# Altium PCB Hyundai_Giraffe.pcbdoc
Units mm, origin at the board's own origin, x right, y up, seen from the top; angles counter-clockwise.
Board outline 98.63 x 70.65 mm, 2 copper layers (Top Layer, Bottom Layer); 8 components, 14 nets, 75 pads, 25 vias.
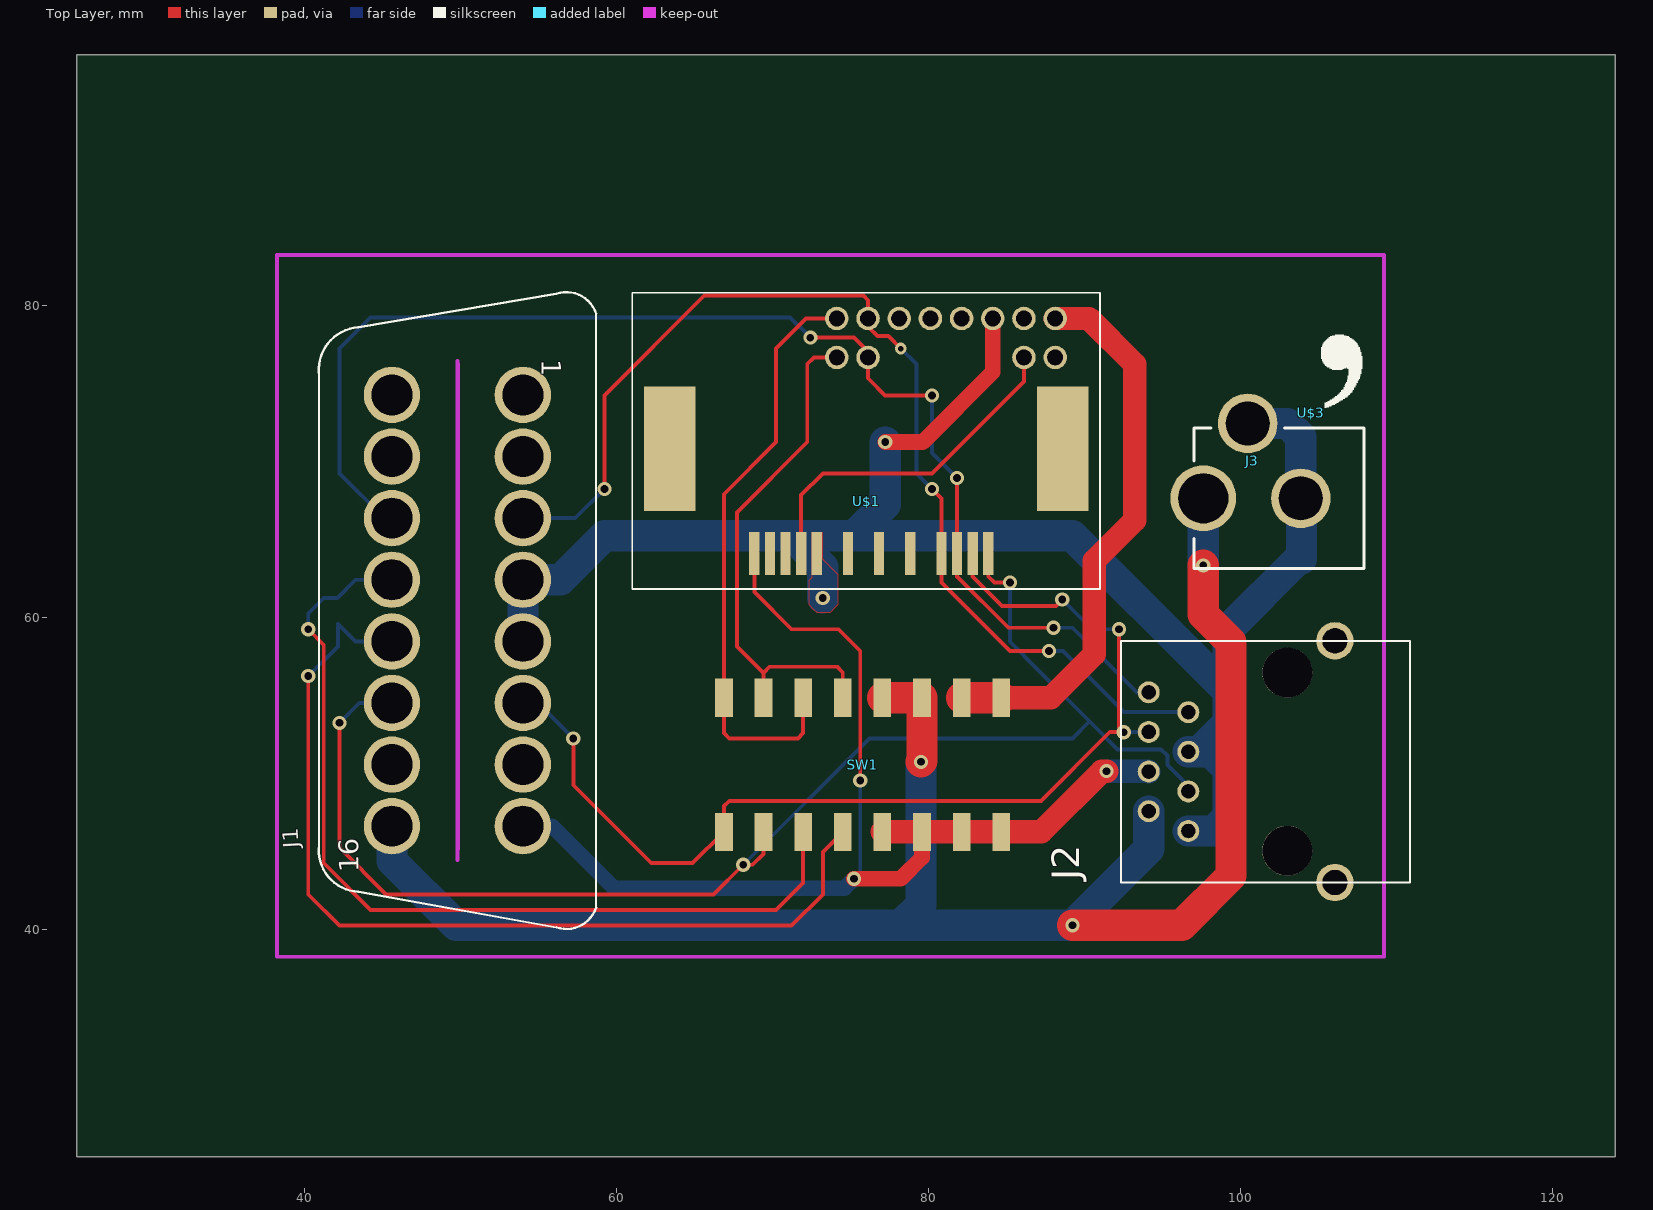
[diagram p0: Top Layer view]
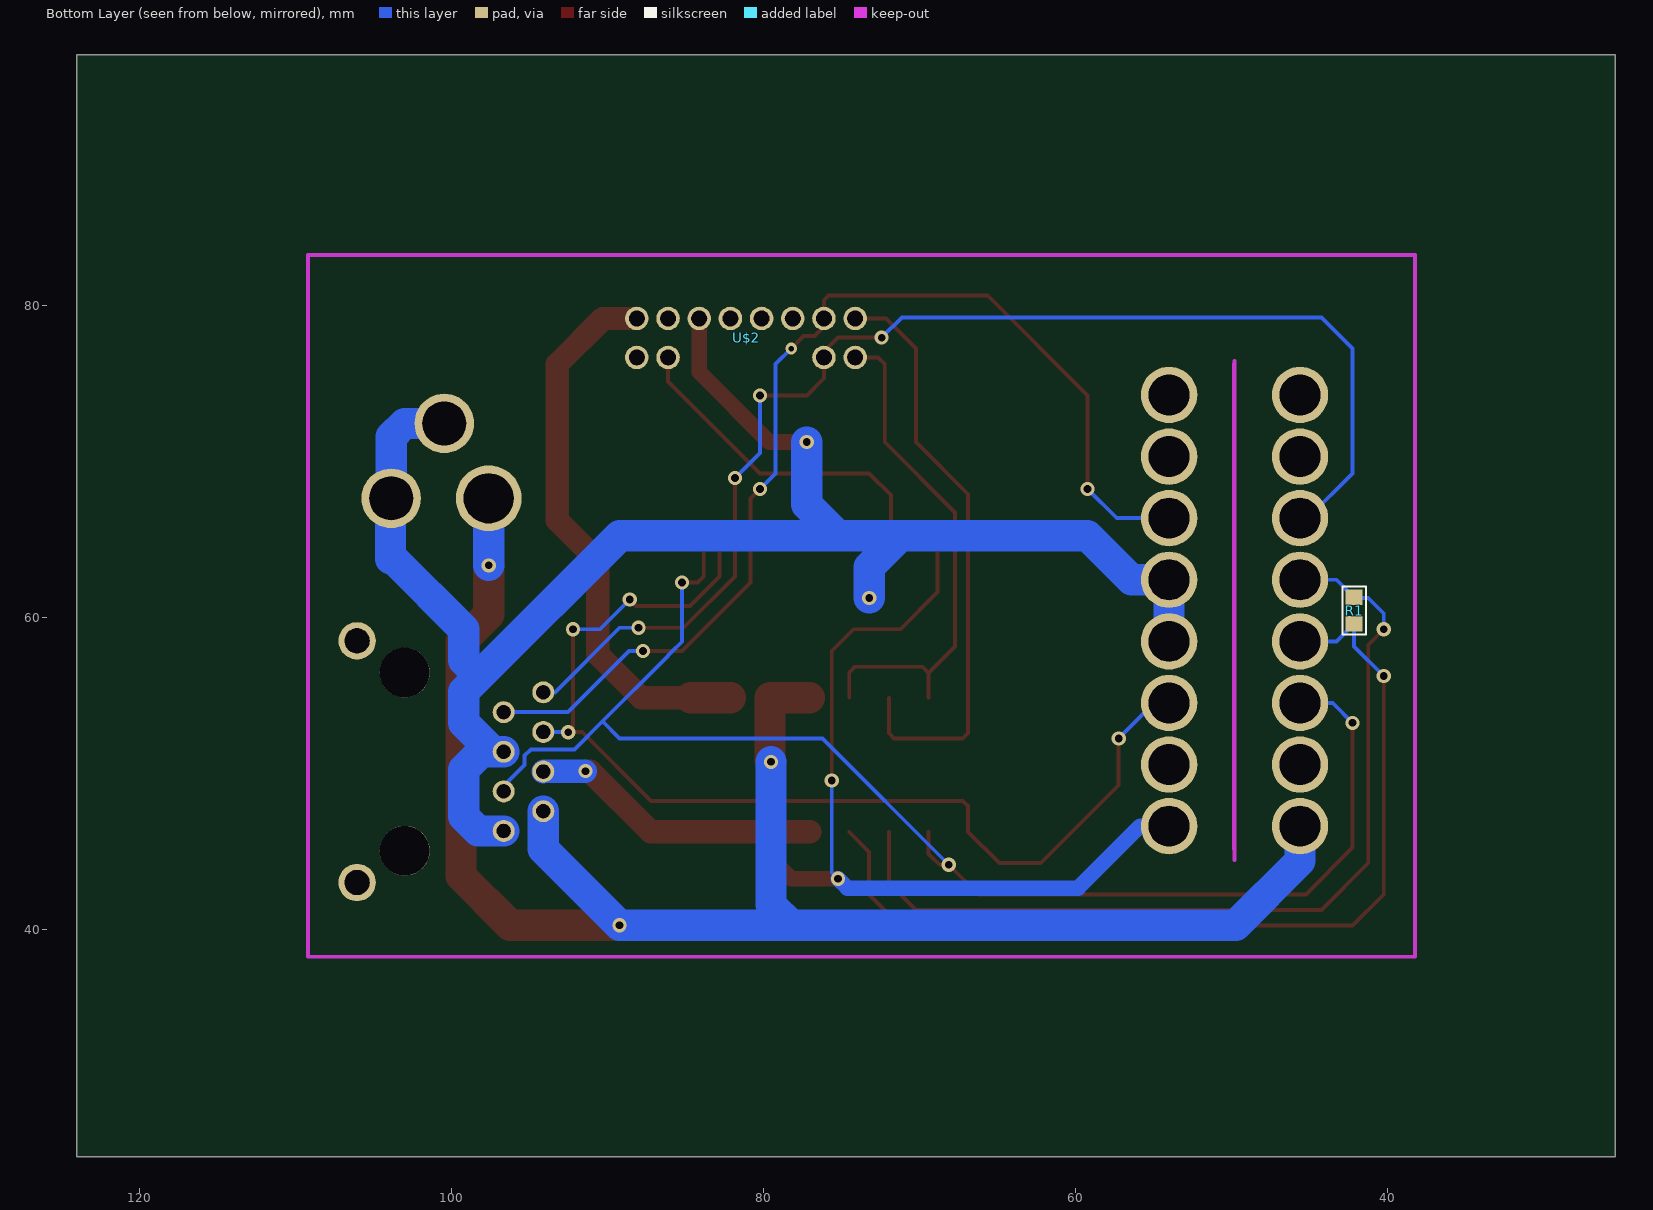
[diagram p1: Bottom Layer view, seen from below]

## Layer stack, top to bottom
Top Layer: signal copper (thickness not stored)
Dielectric: dielectric 0.32, FR-4, Dk 4.8
Bottom Layer: signal copper (thickness not stored)

## Board outline
124.028,25.4 25.4,25.4 25.4,96.054 124.028,96.054

## Components (designator, comment, footprint, x,y, rotation, side; value= is the part's Value field where it differs from the comment)
J1 "OBDII-FEMALE-CUT" OBDII-FEMALE-MIDCUT 49.797,60.427 r90 top
J2 "RA-RJ45RA" RA-RJ45 103.017,50.737 r90 top
J3 "_" DCJACK_2MM_PTH 111.227,67.627 r90 top
R1 "120Ohm" 0603-R 42.127,60.427 r90 bottom
SW1 "4XDPSTSMT" 4-DPST 75.777,50.537 r0 top
U$1 "MG645845" MG645845 76.007,70.807 r180 top
U$2 "MG655794" MG655794 81.127,79.157 r0 bottom
U$3 "_" LOGO 104.527,73.127 r0 top

## Footprints (in the part's own frame and the unit in brackets; to place one, negate y for a bottom-side part, rotate by r counter-clockwise, add the part's x,y. Pads: shape width x height; smd on the part's side, far side on the other; paste and mask are expansions set on the pad)
4-DPST [mm]
  rect 1.13x2.44 smd: 1(-8.89,-4.3) 2(-6.35,-4.3) 3(-3.81,-4.3) 4(-1.27,-4.3) 5(1.27,-4.3) 6(3.81,-4.3) 7(6.35,-4.3) 8(8.89,-4.3) 9(8.89,4.3) 10(6.35,4.3) 11(3.81,4.3) 12(1.27,4.3) 13(-1.27,4.3) 14(-3.81,4.3) 15(-6.35,4.3) 16(-8.89,4.3)
0603-R [mm]
  rect 1x1.1 smd: 1(-0.85,0) 2(0.85,0)
  silkscreen extent -1.55,-0.75 1.55,0.75
DCJACK_2MM_PTH [mm]
  round 3.816 hole 2.8 slot 2.805 at 0 deg: GND(0,7.35)
  round 3.816 hole 2.8 slot 2.805 at 90 deg: GNDBREAK(4.8,10.75)
  round 4.216 hole 3.2 slot 3.205 at 0 deg: PWR(0,13.6)
  silkscreen extent -4.5,3.3 4.5,14.2
LOGO [mm]
  silkscreen extent 0.67,0.29 3.28,4.99
MG645845 [mm]
  rect 0.66x2.75 smd: CAN1_H(-6.83,6.72) CAN1_L(-7.83,6.72) CAN2_H(-4.83,6.72) CAN2_L(-5.83,6.72) GND(3.17,6.72) IGN(7.17,6.72) LDWS(4.17,6.72) P1(6.17,6.72) P6(5.17,6.72) P8(1.17,6.72) P9(-0.83,6.72) P10(-2.83,6.72)
  rect 3.32x8 smd: P$1(-12.6,0) P$2(12.6,0)
  silkscreen extent -15,-10 15,9
MG655794 [mm]
  round 1.508 hole 1: CAN1_H'(-7,0) CAN1_L'(-7,2.5) CAN2_H(-5,0) CAN2_L(-5,2.5) GND(3,0) IGN'(7,0) LDWS(5,2.5) P1(7,2.5) P6(5,0) P8(1,0) P9(-1,0) P10(-3,0)
OBDII-FEMALE-MIDCUT [mm]
  round 3.616 hole 2.6 slot 2.605 at 0 deg: 1(13.825,-4.2) 2(9.875,-4.2) 3(5.925,-4.2) 4(1.975,-4.2) 5(-1.975,-4.2) 6(-5.925,-4.2) 7(-9.875,-4.2) 8(-13.825,-4.2) 9(13.825,4.2) 10(9.875,4.2) 11(5.925,4.2) 12(1.975,4.2) 13(-1.975,4.2) 14(-5.925,4.2) 15(-9.875,4.2) 16(-13.825,4.2)
  Keep-Out Layer lines w0.254: -16,0 16,0
  silkscreen extent -20.42,-8.89 20.42,8.89
RA-RJ45 [mil]
  round 55.43 hole 35.44 slot 35.45 at 0 deg: 1(-175,250) 2(-125,350) 3(-75,250) 4(-25,350) 5(25,250) 6(75,350) 7(125,250) 8(175,350)
  round 94.49 hole 63: P$1(-305.12,-120.08) P$2(305.12,-120.08)
  round 125.98 hole 125.98 unplated: ""(-225,0) ""(225,0)
  silkscreen extent -305,-310 305,420

## Via types
v1: diameter 0.907, hole 0.5, Top Layer to Bottom Layer, 24 vias
v2: diameter 0.756, hole 0.35, Top Layer to Bottom Layer, 1 vias

## Nets (pads, with @x,y where several pads share a name; then routed paths per layer and width w, separated by ;. In a path a pad name is that pad's centre, name@x,y a point inside that pad or via, vN(x,y) a via of type N, cw(c..) or ccw(c..) an arc to the next point about the centre after c; other vN are vias at no path point)
12VIN: J1.16 J2.2 J3.PWR SW1.11 SW1.12 | length 111.2
  Top Layer w1: SW1.11@79.587,54.669 SW1.11
  Top Layer w2: SW1.12 SW1.11 79.587,50.787 v1(79.527,50.727) ; v1(89.243,40.243) 96.243,40.243 99.401,43.401 99.401,58.401 97.627,60.175 v1(97.627,63.327)
  Bottom Layer w2: J1.16 45.597,44.362 49.716,40.243 78.227,40.243 ; v1(79.527,50.727) 79.527,41.543 78.227,40.243 ; J2.2 94.127,45.127 v1(89.243,40.243) 78.227,40.243 ; v1(97.627,63.327) J3.PWR
CAN1_H: J1.6 J2.6 SW1.1 U$1.CAN1_H | length 70
  Top Layer w0.25: v1(57.227,52.227) 57.227,49.227 62.227,44.227 64.877,44.227 SW1.1 66.887,47.887 67.227,48.227 87.227,48.227 91.627,52.627 v1(92.527,52.627) 92.227,52.927 v1(92.227,59.227) ; U$1.CAN1_H 82.837,62.617 84.727,60.727 88.181,60.727 v1(88.581,61.127)
  Bottom Layer w0.25: J1.6 54.952,54.502 v1(57.227,52.227) ; v1(88.581,61.127) 90.481,59.227 v1(92.227,59.227) v1@92.181,59.227 ; v1(92.527,52.627) 94.112,52.627 J2.6
CAN1_H': SW1.14 SW1.16 U$2.CAN1_H' | length 38.4
  Top Layer w0.25: SW1.14 71.967,52.567 71.627,52.227 67.227,52.227 66.887,52.567 SW1.16 66.887,67.887 70.227,71.227 70.227,77.227 72.157,79.157 U$2.CAN1_H'
CAN1_L: J1.14 J2.3 SW1.2 U$1.CAN1_L | length 92.4
  Top Layer w0.25: v1(42.227,53.227) 42.227,45.227 45.227,42.227 66.227,42.227 v1(68.127,44.127) 68.727,44.127 69.427,44.827 SW1.2 SW1.2@69.427,45.427 ; U$1.CAN1_L 83.837,62.617 84.227,62.227 v1(85.227,62.227)
  Bottom Layer w0.25: v1(42.227,53.227) 43.502,54.502 J1.14 ; v1(68.127,44.127) 76.227,52.227 89.227,52.227 90.327,53.327 ; v1(85.227,62.227) 85.227,58.427 85.927,57.727 86.327,57.327 90.327,53.327 ; J2.3 96.667,49.187 95.327,50.527 95.327,51.127 94.927,51.527 92.127,51.527 90.327,53.327
CAN1_L': SW1.13 SW1.15 U$2.CAN1_L' | length 33
  Top Layer w0.25: SW1.15 69.427,56.427 ; U$2.CAN1_L' 72.657,76.657 72.227,76.227 72.227,71.227 67.727,66.727 67.727,58.127 69.427,56.427 ; SW1.13 74.507,56.447 74.127,56.827 69.827,56.827 69.427,56.427
CAN2_H: J1.3 J2.7 U$1.CAN2_H U$2.CAN2_H | length 71.4
  Top Layer w0.25: v1(59.227,68.227) 59.227,74.227 65.627,80.627 75.827,80.627 76.127,80.327 U$2.CAN2_H 76.127,78.627 76.727,78.027 77.427,78.027 v2(78.227,77.227) ; v1(80.227,68.227) 80.837,67.617 U$1.CAN2_H 80.837,62.217 85.227,57.827 v1(87.727,57.827)
  Bottom Layer w0.25: J1.3 57.352,66.352 v1(59.227,68.227) ; v2(78.227,77.227) 79.227,76.227 79.227,69.227 v1(80.227,68.227) ; v1(87.727,57.827) 88.627,57.827 92.542,53.912 J2.7
CAN2_L: J1.11 J2.8 U$1.CAN2_L U$2.CAN2_L | length 82.1
  Top Layer w0.25: v1(72.427,77.927) 75.227,77.927 76.127,77.027 U$2.CAN2_L 76.127,75.327 76.227,75.227 77.227,74.227 v1(80.227,74.227) ; v1(81.827,68.927) 81.837,68.917 U$1.CAN2_L 81.837,62.617 85.127,59.327 v1(88.027,59.327)
  Bottom Layer w0.25: J1.11 45.102,66.352 42.227,69.227 42.227,77.227 44.227,79.227 71.127,79.227 v1(72.427,77.927) ; v1(80.227,74.227) 80.227,70.527 v1(81.827,68.927) ; v1(88.027,59.327) 89.227,59.327 93.372,55.182 J2.8
CAN3_H: J1.12 R1.2 SW1.3 | length 58.7
  Top Layer w0.25: v1(40.227,59.227) 41.227,58.227 41.227,44.227 44.227,41.227 70.227,41.227 71.967,42.967 SW1.3
  Bottom Layer w0.25: v1(40.227,59.227) 40.227,60.227 41.227,61.227 42.077,61.227 R1.2 43.252,62.402 J1.12
CAN3_L: J1.13 R1.1 SW1.4 | length 61.6
  Top Layer w0.25: v1(40.227,56.227) 40.227,42.227 42.227,40.227 71.227,40.227 73.227,42.227 73.227,44.957 SW1.4
  Bottom Layer w0.25: v1(40.227,56.227) 42.127,58.127 R1.1 ; R1.1@42.127,59.227 R1.1 ; J1.13 43.252,58.452 R1.1
GND: J1.4 J1.5 J2.1 J2.5 J3.GND J3.GNDBREAK U$1.GND U$2.GND | length 114.4
  Top Layer w1.016: v1(77.227,71.227) 79.627,71.227 84.127,75.727 U$2.GND
  Bottom Layer w2: J1.5 J1.4 ; J1.4@54.072,62.327 J1.4 ; v1(73.227,61.227) 73.227,63.227 71.227,65.227 ; v1(77.227,71.227) 77.227,67.227 75.227,65.227 ; J2.1 98.292,46.292 99.227,47.227 99.227,50.227 98.082,51.372 J2.5 97.372,51.372 99.227,53.227 99.227,55.227 98.227,56.227 ; J3.GNDBREAK 103.027,72.427 103.877,71.577 J3.GND 103.927,67.577 103.927,63.727 103.727,63.727 99.227,59.227 99.227,57.227 98.227,56.227 ; J1.4 56.402,62.402 59.227,65.227 71.227,65.227 ; 71.227,65.227 75.227,65.227 ; 75.227,65.227 89.227,65.227 98.227,56.227
IGN: J1.8 J2.4 SW1.5 SW1.6 SW1.7 SW1.8 U$1.IGN | length 74
  Top Layer w0.25: U$1.IGN 68.837,61.617 71.227,59.227 74.227,59.227 75.627,57.827 v1(75.627,49.527)
  Top Layer w1: v1(75.222,43.232) 77.222,43.232 77.227,43.227 78.227,43.227 79.587,44.587 SW1.6
  Top Layer w1.5: SW1.5 SW1.6 SW1.7 SW1.8 87.237,46.237 91.127,50.127 v1(91.427,50.127)
  Bottom Layer w0.25: v1(75.222,43.232) 75.627,43.637 v1(75.627,49.527)
  Bottom Layer w1: J1.8 55.852,46.602 59.827,42.627 74.617,42.627 v1(75.222,43.232)
  Bottom Layer w1.5: v1(91.427,50.127) 94.102,50.127 J2.4
IGN': SW1.9 SW1.10 U$2.IGN' | length 35.6
  Top Layer w1.5: SW1.9 87.837,54.837 90.627,57.627 90.627,63.627 93.227,66.227 93.227,76.227 90.297,79.157 U$2.IGN'
  Top Layer w2: SW1.10 SW1.9
LDWS: U$1.LDWS U$2.LDWS | length 22.6
  Top Layer w0.25: U$1.LDWS 71.837,67.837 73.227,69.227 80.227,69.227 86.127,75.127 U$2.LDWS
N$8: U$1.P10
pads on no net: J1.1 J1.2 J1.7 J1.9 J1.10 J1.15 J2. J2.P$1 J2.P$2 U$1.P1 U$1.P6 U$1.P8 U$1.P9 U$1.P$1 U$1.P$2 U$2.P1 U$2.P6 U$2.P8 U$2.P9 U$2.P10

## Polygon pours and split planes (outlines as drawn)
GND on Top Layer (solid): 72.527,65.427 72.527,62.527 72.327,62.327 72.327,61.127 72.327,60.827 72.627,60.527 72.827,60.327 73.227,60.327 73.627,60.327 73.727,60.327 74.027,60.627 74.227,60.827 74.227,61.227 74.227,62.327 74.227,62.727 74.127,62.827 73.227,63.727 73.227,63.827 73.227,65.427

## Silkscreen, mask and mechanical layers (free items; w line width, h text height)
Document:
  text "09/06/18" at 96.227,79.227 h1.78

## Text inside footprints (layer, text, board x,y; h text height)
J1: Top Overlay "1" at 55.208,76.556 h1.27 r270; Top Overlay "16" at 43.462,43.643 h1.27 r91
J3: Document "DC 2.0/2.1" at 109.957,64.339 h0.81 r92